# EAGLE board ModuleCarrier-MTS-Dragonfly (EAGLE 7.7.0)
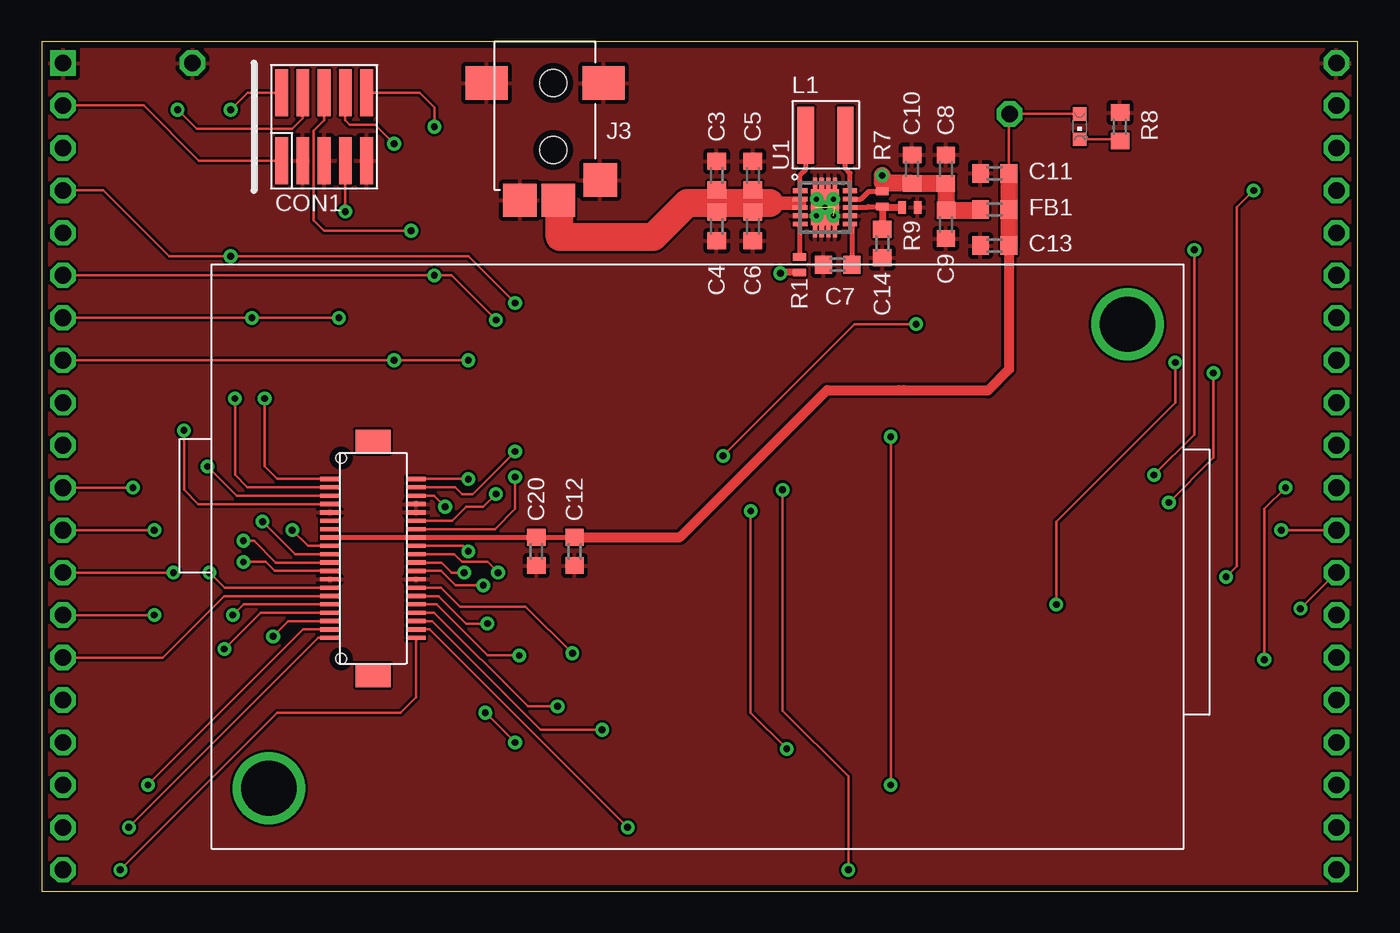
[diagram p0: board, top side]
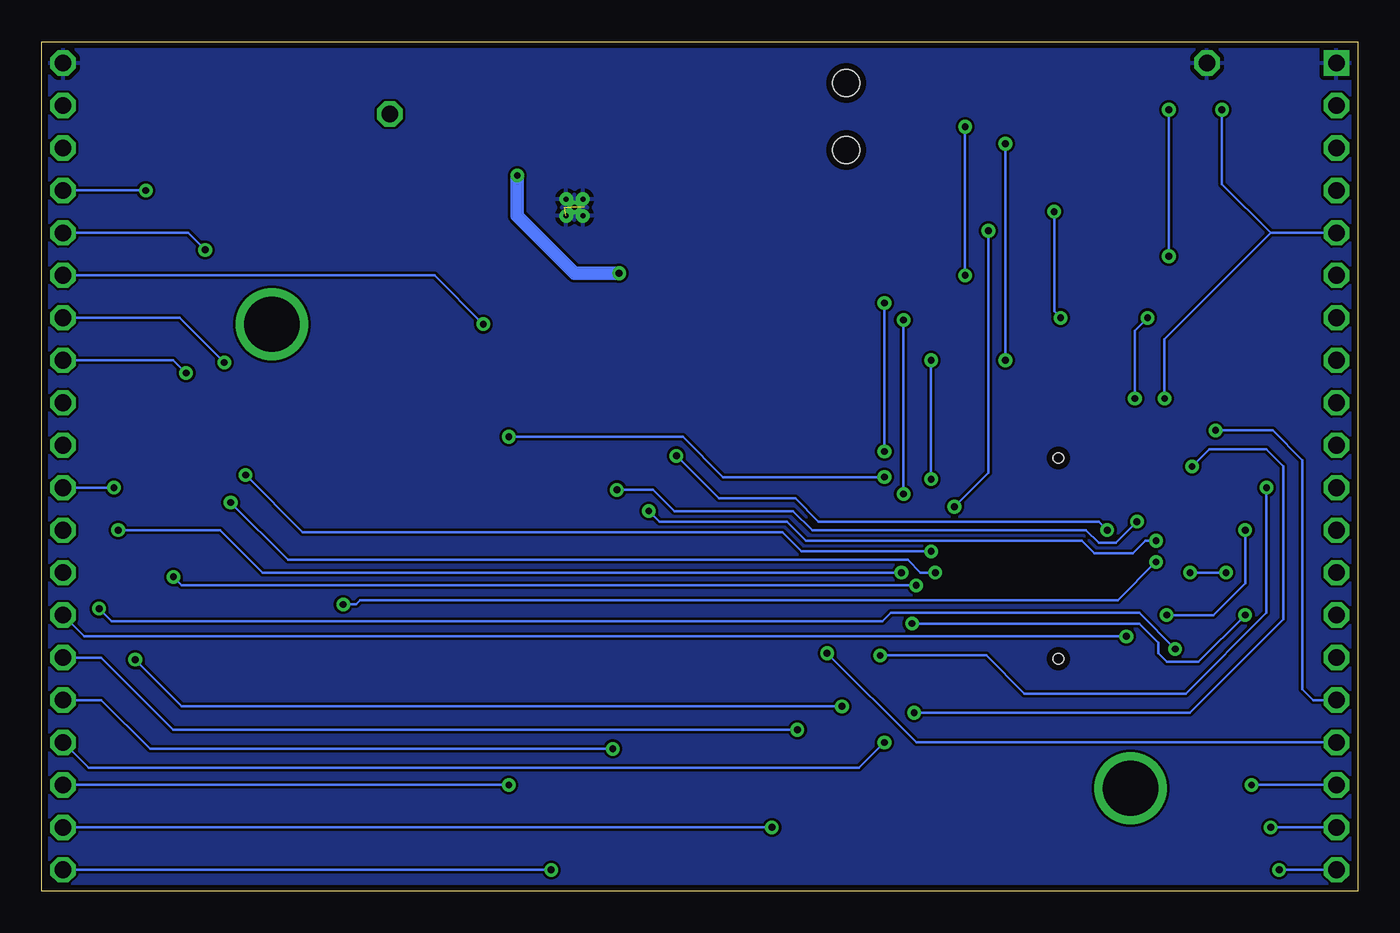
[diagram p1: board, bottom side, seen from below]

Size 78.74 x 50.8 mm. Coordinates in mm from the lower left corner, seen from the top.
Copper layers ((1*16)): Top 0.035mm / dielectric 0.8mm / Bottom 0.035mm
Design rules "mbed-HDK-6-6-2-layer": minimum track width 6mil, minimum drill 9mil, track to track 6mil, track to pad 6mil, pad to pad 6mil, via to via 6mil, smd to smd 6mil, copper to edge 15mil, drill to drill 8mil, minimum pad ring 10mil, minimum via ring 8mil, stop-mask expansion 4mil, vias tented up to drill 0mil, thermal gap 10mil

## Footprints (pad centres in the part's own frame; a part is rotated, then mirrored left to right if it is on the bottom)
0603 = smd 1 x 1.1: 1 -0.85,0; 2 0.85,0
FTSH-105-02 = smd 0.762 x 2.794: 1 0.381,-2.032; 2 0.381,2.032; 3 1.651,-2.032; 4 1.651,2.032; 5 2.921,-2.032; 6 2.921,2.032; 7 4.191,-2.032; 8 4.191,2.032; 9 5.461,-2.032; 10 5.461,2.032
FC68145S = smd 2.5 x 2: CASE1 -4,4; P$5 3,4 | smd 2 x 2: SHUNT 2.8,-1.8; SLEEVE -2,-3; TIP 0.3,-3 | hole 1.6: 0,0; 0,4
XFL4020-472MEC = smd 0.98 x 3.4: P$1 0,0; P$2 2.37,0
CHIPLED_0603 = smd 0.8 x 0.8: A 0,-0.75; C 0,0.75
MULITECH-DRAGONFLY-BREAKOUT = smd 0.25 x 1.15: 1 -22.11,7.08; 2 -21.61,7.08; 3 -21.11,7.08; 4 -20.61,7.08; 5 -20.11,7.08; 6 -19.61,7.08; 7 -19.11,7.08; 8 -18.61,7.08; 9 -18.11,7.08; 10 -17.61,7.08; 11 -17.11,7.08; 12 -16.61,7.08; 13 -16.11,7.08; 14 -15.61,7.08; 15 -15.11,7.08; 16 -14.61,7.08; 17 -14.11,7.08; 18 -13.61,7.08; 19 -13.11,7.08; 20 -12.61,7.08; 21 -12.61,12.23; 22 -13.11,12.23; 23 -13.61,12.23; 24 -14.11,12.23; 25 -14.61,12.23; 26 -15.11,12.23; 27 -15.61,12.23; 28 -16.11,12.23; 29 -16.61,12.23; 30 -17.11,12.23; 31 -17.61,12.23; 32 -18.11,12.23; 33 -18.61,12.23; 34 -19.11,12.23; 35 -19.61,12.23; 36 -20.11,12.23; 37 -20.61,12.23; 38 -21.11,12.23; 39 -21.61,12.23; 40 -22.11,12.23 | drill 3.3: P$1 -31.37,54.81; P$2 -3.61,3.43 | smd 1.4 x 2.1: P$43 -24.36,9.655; P$44 -10.36,9.655 | hole 0.6: -11.36,7.755; -23.36,7.755
MODULE_DAUGHTER = drill 1 square: 1 0,0 | drill 1 octagon: 2 0,-2.54; 3 0,-5.08; 4 0,-7.62; 5 0,-10.16; 6 0,-12.7; 7 0,-15.24; 8 0,-17.78; 9 0,-20.32; 10 0,-22.86; 11 0,-25.4; 12 0,-27.94; 13 0,-30.48; 14 0,-33.02; 15 0,-35.56; 16 0,-38.1; 17 0,-40.64; 18 0,-43.18; 19 0,-45.72; 20 0,-48.26; 21 76.2,-48.26; 22 76.2,-45.72; 23 76.2,-43.18; 24 76.2,-40.64; 25 76.2,-38.1; 26 76.2,-35.56; 27 76.2,-33.02; 28 76.2,-30.48; 29 76.2,-27.94; 30 76.2,-25.4; 31 76.2,-22.86; 32 76.2,-20.32; 33 76.2,-17.78; 34 76.2,-15.24; 35 76.2,-12.7; 36 76.2,-10.16; 37 76.2,-7.62; 38 76.2,-5.08; 39 76.2,-2.54; 40 76.2,0
0402 = smd 0.457 x 0.762: 1 -0.457,0; 2 0.457,0
TP50-PTH = drill 1 octagon: TP 0,0
DSC-S-PWSON-N10 = smd 0.85 x 0.28: 1 -1.488,1; 2 -1.488,0.5; 3 -1.488,0; 4 -1.488,-0.5; 5 -1.488,-1; 6 1.5,-1; 7 1.5,-0.5; 8 1.5,0; 9 1.5,0.5; 10 1.5,1 | smd 1.7 x 2.15: PP 0,0 | smd 0.25 x 3.55: PP@1 0.6,0; PP@2 0.2,0; PP@3 -0.2,0; PP@4 -0.6,0 | drill 0.3 pad 0.4: PP@5 0.5,0.5; PP@7 0,0; PP@8 0.5,-0.5; PP@9 -0.5,0.5; PP@10 -0.5,-0.5

## Placement (x,y rotation side)
C3  10uF  [0603]  40.39,42.8 90 top
C4  10uF  [0603]  40.39,39.75 270 top
C5  10nF  [0603]  42.55,39.75 270 top
C6  33pF  [0603]  42.55,42.8 90 top
C7  10nF  [0603]  47.62,37.47 180 top
C8  22uF  [0603]  54.1,43.18 90 top
C9  22uF  [0603]  54.1,39.88 270 top
C10  22uF  [0603]  52.07,43.18 90 top
C11  33pF  [0603]  57.02,42.93 180 top
C12  22uF  [0603]  31.88,20.32 270 top
C13  10nF  [0603]  57.02,38.61 180 top
C14  10pF  [0603]  50.29,38.73 270 top
C20  10nF  [0603]  29.59,20.32 270 top
CON1  SWD-10/TC2050_SMD  [FTSH-105-02]  13.97,45.72 0 top
FB1  120 Ohm  [0603]  57.02,40.77 0 top
J3  FC68145S  [FC68145S]  30.61,44.32 0 top
L1  1.5uH  [XFL4020-472MEC]  45.72,45.21 0 top
LED1  RED  [CHIPLED_0603]  62.1,45.72 180 top
MOD1  MULITECH-DRAGONFLY-BREAKOUT  [MULITECH-DRAGONFLY-BREAKOUT]  10.16,2.54 270 top
MOD2  MODULE_DAUGHTER  [MODULE_DAUGHTER]  1.27,49.53 0 top
R1  100K  [0402]  45.34,37.47 270 top
R7  681K  [0402]  50.29,41.4 90 top
R8  2k2  [0603]  64.52,45.72 270 top
R9  75K  [0402]  51.94,40.89 180 top
TP1  TEST-POINT-50R-PTH  [TP50-PTH]  57.91,46.48 0 top
TP2  TEST-POINT-50R-PTH  [TP50-PTH]  9.02,49.53 0 top
U1  TPS63060DSCR  [DSC-S-PWSON-N10]  46.86,40.89 0 top

## Library data of the parts
C3-C14 C20 FB1 L1 R1 R7 R9 = mbed-HDK-RLCQ
CON1 = mbed-HDK-Connector
J3 = LabBoard
LED1 = mbed-HDK-Optical; MF: Wurth Electronics Inc; MFN: 150060RS75000; OC-DIGIKEY: 732-4978-1-ND; OC-MOUSER: 710-150060RS75000; OC-NEWARK: 2322071
MOD1 = blackbriar; MF: Hirose; MFN: DF17(2.0)-40DP-0.5V(57); OC-DIGIKEY: H11130CT-ND; OC-MOUSER: 798-DF172040DP05V57; OC-NEWARK: 2300341
MOD2 = blackbriar
R8 = mbed-HDK-RLC
TP1 TP2 = mbed-HDK
U1 = mbed-HDK-Power; MF: TEXAS INSTRUMENTS; MFN: TPS63060DSCR; OC-DIGIKEY: 296-30204-1-ND; OC-MOUSER: 595-TPS63060DSCR; OC-NEWARK: 76T8143

## Nets
+3.3V_TGT: CON1.1 MOD2.2
+5V: C11.1 C12.1 C13.1 C20.1 FB1.2 LED1.A MOD1.8 MOD1.33 TP1.TP
AIN0: MOD1.19 MOD2.18
AIN1: MOD1.20 MOD2.19
AIN2: MOD1.21 MOD2.20
GND: C3.2 C4.2 C5.2 C6.2 C7.2 C8.2 C9.2 C10.2 C11.2 C12.2 C13.2 C14.2 C20.2 CON1.3 CON1.5 CON1.9 J3.CASE1 J3.P$5 J3.SHUNT J3.SLEEVE MOD1.5 MOD1.13 MOD1.28 MOD1.36 MOD1.37 MOD2.1 MOD2.40 R8.1 R9.1 TP2.TP U1.4 U1.7 U1.PP U1.PP@1 U1.PP@2 U1.PP@3 U1.PP@4 U1.PP@5 U1.PP@7 U1.PP@8 U1.PP@9 U1.PP@10
GP0: MOD1.4 MOD2.16
GP1: MOD1.27 MOD2.17
GP2: MOD1.3 MOD2.24
GP3: MOD1.11 MOD2.25
GP4: MOD1.30 MOD2.33
GP5: MOD1.12 MOD2.34
GP6: MOD1.9 MOD2.35
GP7: MOD1.32 MOD2.36
GP8: MOD1.29 MOD2.37
I2C1_SCL: MOD1.16 MOD2.12
I2C1_SDA: MOD1.25 MOD2.11
I2C3_SCL: MOD1.31 MOD2.29
I2C3_SDA: MOD1.24 MOD2.30
N$17: C7.1 U1.6
N$18: L1.P$1 U1.1
N$19: L1.P$2 U1.10
N$20: C14.1 R7.1 R9.2 U1.8
N$21: C8.1 C9.1 C10.1 FB1.1 R1.2 R7.2 U1.9
N$23: R1.1 U1.5
PA_1: LED1.C R8.2
PWM0: MOD1.10 MOD2.21
PWM1: MOD1.22 MOD2.22
PWM2: MOD1.34 MOD2.23
SPI1_MISO: MOD1.26 MOD2.14
SPI1_MOSI: MOD1.14 MOD2.13
SPI1_SCK: MOD1.15 MOD2.15
SPI2_MISO: MOD1.18 MOD2.27
SPI2_MOSI: MOD1.17 MOD2.28
SPI2_SCK: MOD1.23 MOD2.26
TGT_NRESET: CON1.10 MOD1.35 MOD2.6
TGT_RX: CON1.8 MOD1.40 MOD2.8
TGT_SWCLK: CON1.4 MOD1.2 MOD2.5
TGT_SWDIO: CON1.2 MOD1.39 MOD2.4
TGT_SWO: CON1.6 MOD1.38
TGT_TX: CON1.7 MOD1.1 MOD2.7
VIN: C3.1 C4.1 C5.1 C6.1 J3.TIP U1.2 U1.3

## Tracks (layer width: path | path; a pad name or v marks a point on that pad's centre or on a via)
+3.3V_TGT
  Top 0.152: CON1.1 9.4,43.69 6.1,46.99 MOD2.2
+5V
  Top 0.152: C11.1 57.87,46.44 TP1.TP 62.09,46.48 LED1.A
  Top 0.305: C12.1 C20.1 26.65,21.15 MOD1.33 MOD1.8
  Top 0.61: C13.1 57.87,31.2 56.64,29.97 | 56.64,29.97 56.6,29.93 | 56.64,29.97 51.56,29.97 51.31,29.97 46.99,29.97 38.19,21.17 C12.1
  Top 1.016: C11.1 FB1.2 C13.1
AIN0  (via drill 0.41)
  Top 0.152: MOD1.19 15.65,15.65 v6.35,6.35
  Bottom 0.152: v6.35,6.35 MOD2.18
AIN1  (via drill 0.41)
  Top 0.152: MOD1.20 16.55,15.15 v5.21,3.81
  Bottom 0.152: v5.21,3.81 MOD2.19
AIN2  (via drill 0.41)
  Top 0.152: MOD1.21 22.39,11.59 21.46,10.67 14.1,10.67 v4.7,1.27
  Bottom 0.152: v4.7,1.27 MOD2.20
GND  (5 unrouted)
  pour Bottom: 0,0 78.74,0 78.74,50.8 0,50.8
  pour Top: 0,0 78.74,0 78.74,50.8 0,50.8
GP0  (via drill 0.41)
  Top 0.152: MOD1.4 9.36,23.15 8.51,24 v8.51,27.56
  Bottom 0.152: MOD2.16 2.67,11.43 3.3,12.06 3.3,25.78 5.08,27.56 v8.51,27.56
GP1  (via drill 0.41)
  Top 0.152: MOD1.27 23.89,18.15 25.02,17.02 28.96,17.02 v31.75,14.22
  Bottom 0.152: v31.75,14.22 26.42,8.89 MOD2.17
GP2  (via drill 0.41)
  Top 0.152: MOD1.3 11.66,23.65 v9.91,25.4 | v28.32,8.89 v26.54,10.67
  Bottom 0.152: MOD2.24 75.95,7.37 29.84,7.37 v28.32,8.89 | v26.54,10.67 10.03,10.67 4.45,16.26 4.45,25.4 5.46,26.42 8.89,26.42 v9.91,25.4
GP3  (via drill 0.41)
  Top 0.152: MOD1.11 14,19.65 12.7,20.96 v12.06,20.96 | v42.42,22.73 42.42,10.67 v44.58,8.51
  Bottom 0.152: v12.06,20.96 12.7,20.96 13.46,20.19 15.75,20.19 16.51,20.96 33.02,20.96 34.16,22.1 41.78,22.1 v42.42,22.73 | MOD2.25 75.18,11.43 72.26,8.51 v44.58,8.51
GP4  (via drill 0.41)
  Top 0.152: MOD1.30 23.91,19.65 24.51,19.05 v25.27,19.05 | v70.1,30.99 70.1,25.91 v67.44,23.24
  Bottom 0.152: v25.27,19.05 26.16,19.05 26.92,19.81 64.01,19.81 v67.44,23.24 | MOD2.33 70.87,31.75 v70.1,30.99
GP5  (via drill 0.41)
  Top 0.152: MOD1.12 13.94,19.15 13.41,19.69 v12.06,19.69 | v67.82,31.62 67.82,29.21 60.71,22.1 v60.71,17.15
  Bottom 0.152: MOD2.34 70.48,34.29 v67.82,31.62 | v60.71,17.15 59.94,17.15 59.69,17.4 14.35,17.4 v12.06,19.69
GP6  (via drill 0.41)
  Top 0.152: MOD1.9 15.93,20.65 v14.99,21.59 | v40.77,26.04 48.64,33.91 v52.32,33.91
  Bottom 0.152: v14.99,21.59 15.49,22.1 32.26,22.1 33.66,23.5 38.23,23.5 v40.77,26.04 | v52.32,33.91 55.25,36.83 MOD2.35
GP7  (via drill 0.41)
  Top 0.152: MOD1.32 25.2,20.65 v25.53,20.32 | v68.96,38.35 68.96,27.3 v66.55,24.89
  Bottom 0.152: v25.53,20.32 33.27,20.32 34.42,21.46 63.12,21.46 v66.55,24.89 | MOD2.36 69.98,39.37 v68.96,38.35
GP8  (via drill 0.41)
  Top 0.152: MOD1.29 23.9,19.15 24.77,18.29 v26.42,18.29 | v70.87,18.8 71.5,19.43 71.5,40.89 v72.52,41.91
  Bottom 0.152: v26.42,18.29 70.36,18.29 v70.87,18.8 | v72.52,41.91 MOD2.37
I2C1_SCL  (via drill 0.41)
  Top 0.152: MOD1.16 12.07,17.15 v11.43,16.51 | MOD2.12 v6.73,21.59
  Bottom 0.152: v11.43,16.51 8.64,16.51 6.73,18.42 v6.73,21.59
I2C1_SDA  (via drill 0.41)
  Top 0.152: MOD1.25 23.62,17.15 26.67,14.1 v28.57,14.1 | v5.46,24.13 MOD2.11
  Bottom 0.152: v28.57,14.1 22.22,14.1 19.94,11.81 10.29,11.81 5.46,16.64 v5.46,24.13
I2C3_SCL  (via drill 0.41)
  Top 0.152: MOD1.31 24.68,20.15 25.15,19.69 26.67,19.69 v27.3,19.05 | v74.17,21.59 MOD2.29
  Bottom 0.152: v27.3,19.05 65.53,19.05 68.07,21.59 v74.17,21.59
I2C3_SDA  (via drill 0.41)
  Top 0.152: MOD1.24 23.48,16.65 29.08,11.05 v30.86,11.05 | v73.15,13.84 73.15,22.86 v74.42,24.13
  Bottom 0.152: v74.42,24.13 MOD2.30 | v30.86,11.05 70.36,11.05 v73.15,13.84
N$17
  Top 0.305: U1.6 48.48,39.78 C7.1
N$18
  Top 0.305: U1.1 45.38,42.84 45.72,43.18 L1.P$1
N$19
  Top 0.305: U1.10 48.36,42.95 48.09,43.22 L1.P$2
N$20
  Top 0.305: U1.8 49.4,40.89 49.45,40.95 R7.1
  Top 0.406: C14.1 R7.1 50.34,40.89 R9.2
N$21  (via drill 0.41)
  Top 0.305: U1.9 49.01,41.39 49.48,41.86 R7.2 50.29,42.42
  Top 0.406: R1.2 44.25,37.01 v44.2,36.96
  Top 1.016: v50.29,42.8 50.29,42.42 50.38,42.33 C10.1 C8.1 C9.1 56.13,40.73 FB1.1
  Bottom 0.813: v50.29,42.8 50.29,40.39 46.86,36.96 v44.2,36.96
N$23
  Top 0.305: U1.5 45.34,39.86 R1.1
PA_1
  Top 0.152: LED1.C 64.42,44.97 R8.2
PWM0  (via drill 0.41)
  Top 0.152: MOD1.10 15.16,20.15 v13.21,22.1 | v44.32,24 44.32,10.8 48.26,6.86 v48.26,1.27
  Bottom 0.152: v13.21,22.1 14.48,20.83 15.49,20.83 16.26,21.59 32.64,21.59 33.78,22.73 40.89,22.73 42.16,24 v44.32,24 | v48.26,1.27 MOD2.21
PWM1  (via drill 0.41)
  Top 0.152: MOD1.22 23.21,15.65 v35.05,3.81
  Bottom 0.152: v35.05,3.81 MOD2.22
PWM2  (via drill 0.41)
  Top 0.152: MOD1.34 27.11,21.65 28.32,22.86 v28.32,24.77 | v50.8,6.35 v50.8,27.18
  Bottom 0.152: v28.32,24.77 37.97,24.77 40.39,27.18 v50.8,27.18 | MOD2.23 v50.8,6.35
SPI1_MISO  (via drill 0.41)
  Top 0.152: MOD1.26 23.75,17.65 25.4,16 v26.67,16 | MOD2.14 v6.73,16.51
  Bottom 0.152: v6.73,16.51 9.53,13.72 11.43,13.72 11.94,14.22 11.94,14.86 13.08,16 v26.67,16
SPI1_MOSI  (via drill 0.41)
  Top 0.152: MOD1.14 10.93,18.15 v10.03,19.05 | MOD2.13 v7.87,19.05
  Bottom 0.152: v7.87,19.05 v10.03,19.05
SPI1_SCK
  Top 0.152: MOD1.15 10.92,17.65 7.24,13.97 MOD2.15
SPI2_MISO  (via drill 0.41)
  Top 0.152: MOD1.18 14.75,16.15 v13.84,15.24
  Bottom 0.152: MOD2.27 76.2,15.24 v13.84,15.24
SPI2_MOSI  (via drill 0.41)
  Top 0.152: MOD1.17 13.09,16.65 v10.92,14.48 | MOD2.28 v75.31,16.89
  Bottom 0.152: v10.92,14.48 13.08,16.64 27.94,16.64 28.45,16.13 74.55,16.13 v75.31,16.89
SPI2_SCK  (via drill 0.41)
  Top 0.152: MOD1.23 23.35,16.15 29.84,9.65 v33.53,9.65
  Bottom 0.152: v33.53,9.65 70.87,9.65 75.18,13.97 MOD2.26
TGT_NRESET  (via drill 0.41)
  Top 0.152: MOD2.6 v23.5,36.83 24.51,36.83 v27.18,34.16 | MOD1.35 24.56,22.15 25.4,22.99 26.42,22.99 v27.18,23.75 | v23.5,45.72 23.5,46.86 22.61,47.75 CON1.10
  Bottom 0.152: v27.18,23.75 v27.18,34.16 | v23.5,45.72 v23.5,36.83
TGT_RX  (via drill 0.41)
  Top 0.152: MOD2.8 v21.08,31.75 v25.53,31.75 | MOD1.40 25.52,24.65 v25.53,24.64 | CON1.8 18.16,46.1 18.41,45.85 19.94,45.85 v21.08,44.7
  Bottom 0.152: v25.53,24.64 v25.53,31.75 | v21.08,44.7 v21.08,31.75
TGT_SWCLK  (via drill 0.41)
  Top 0.152: MOD1.2 12.81,24.15 12.3,24.15 11.56,24.89 v11.56,29.46 | CON1.4 15.62,46.23 14.99,45.59 9.27,45.59 v8.13,46.74
  Bottom 0.152: v11.56,29.46 11.56,33.02 5.21,39.37 | 5.21,39.37 MOD2.5 | v8.13,46.74 8.13,42.29 5.21,39.37
TGT_SWDIO  (via drill 0.41)
  Top 0.152: MOD2.4 3.68,41.91 7.62,37.97 v11.3,37.97 25.53,37.97 v28.32,35.18 | MOD1.39 24.75,24.15 25.15,23.75 25.78,23.75 v28.32,26.29 | CON1.2 12.32,47.75 v11.3,46.74
  Bottom 0.152: v11.3,46.74 v11.3,37.97 | v28.32,35.18 v28.32,26.29
TGT_SWO  (via drill 0.41)
  Top 0.152: MOD1.38 23.47,23.65 v24.13,22.99 | CON1.6 16.89,46.1 16.26,45.47 16.26,40.13 16.89,39.5 v22.1,39.5
  Bottom 0.152: v22.1,39.5 22.1,25.02 v24.13,22.99
TGT_TX  (via drill 0.41)
  Top 0.152: MOD1.1 14.08,24.65 13.33,25.4 v13.33,29.46 | MOD2.7 v12.57,34.29 v17.78,34.29 | CON1.7 v18.16,40.64
  Bottom 0.152: v13.33,29.46 13.33,33.53 v12.57,34.29 | v18.16,40.64 18.16,34.67 v17.78,34.29
VIN
  Top 0.254: U1.2 U1.3 45.38,41.15 45.34,41.15 | C5.1 43.05,41.11 43.05,41.15 | C6.1 43.35,41.15 43.56,41.15 | C3.1 C4.1 39.16,40.6 38.61,41.15
  Top 0.813: 45.34,41.15 43.56,41.15
  Top 1.676: 43.56,41.15 43.05,41.15 38.61,41.15 36.58,39.12 30.99,39.12 30.99,41.24 J3.TIP